# Altium PCB Carrier with Power Supply.PcbDoc (part 3 of 4)
Units mm, origin at the board's own origin, x right, y up, seen from the top; angles counter-clockwise.
Board outline 756.27 x 168 mm, 6 copper layers (Top Layer, Signal Layer 2, Signal Layer 1, VCC, GND, Bottom Layer), stack 1.551 mm thick; 145 components, 326 nets, 1962 pads, 760 vias.
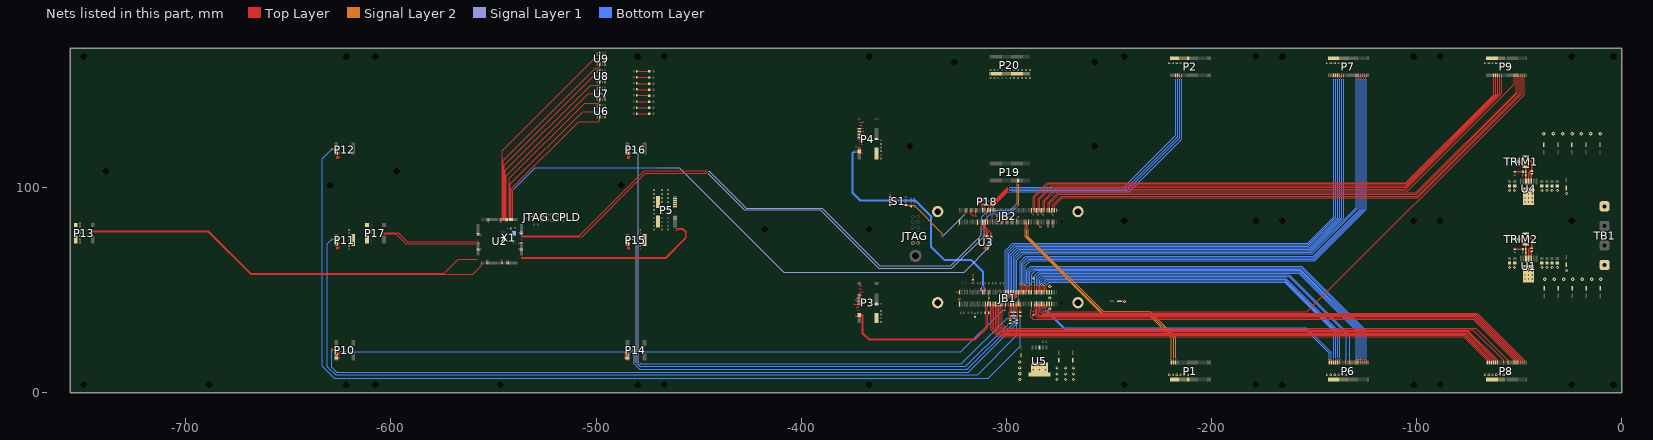
[diagram p7: the nets of this part, all layers, seen from the top]

## Via types
v1: diameter 0.5, hole 0.3, Top Layer to Bottom Layer, 213 vias
v2: diameter 0.9, hole 0.5, Top Layer to Bottom Layer, 182 vias
v3: diameter 0.7, hole 0.3, Top Layer to Bottom Layer, 112 vias
v4: diameter 1.1, hole 0.7, Top Layer to Bottom Layer, 84 vias
v5: diameter 1.5, hole 0.7, Top Layer to Bottom Layer, 59 vias
v6: diameter 1.7, hole 0.7, Top Layer to Bottom Layer, 58 vias
v7: diameter 0.8, hole 0.3, Top Layer to Bottom Layer, 36 vias
v8: diameter 0.9, hole 0.3, Top Layer to Bottom Layer, 6 vias
v9: diameter 1, hole 0.5, Top Layer to Bottom Layer, 4 vias
v10: diameter 1.1, hole 0.5, Top Layer to Bottom Layer, 4 vias
v11: diameter 0.7, hole 0.5, Top Layer to Bottom Layer, 1 vias
v12: diameter 1.3, hole 0.7, Top Layer to Bottom Layer, 1 vias

## Nets (pads, with @x,y where several pads share a name; then routed paths per layer and width w, separated by ;. In a path a pad name is that pad's centre, name@x,y a point inside that pad or via, vN(x,y) a via of type N, cw(c..) or ccw(c..) an arc to the next point about the centre after c; other vN are vias at no path point) (continued)
FO_TX20: JB2.77 P2.23 | length 138.4
  Top Layer w0.3: JB2.77@-306.037,89.056 -306.037,91.371 -299.238,98.171 v1(-298.06,98.171) ; v3(-214.475,153.229) P2.23@-214.476,154.907
  Bottom Layer w0.3: v1(-298.06,98.171) -240.079,98.171 -214.475,123.775 v3(-214.475,153.229)
FO_TX21: JB2.79 P2.19 | length 137.9
  Top Layer w0.3: JB2.79@-306.837,89.056 -306.837,91.278 -299.305,98.811 v1(-298.96,98.811) ; v3@-215.476,153.23 P2.19@-215.476,154.907
  Bottom Layer w0.3: v1(-298.96,98.811) -240.979,98.811 -215.475,124.315 v3(-215.475,153.229)
FO_TX22: JB2.81 P2.15 | length 137.2
  Top Layer w0.3: JB2.81@-307.637,89.056 -307.637,91.185 -299.252,99.571 v1(-298.06,99.571) ; v3@-216.476,153.23 P2.15@-216.476,154.907
  Bottom Layer w0.3: v1(-298.06,99.571) -241.879,99.571 -216.475,124.975 v3(-216.475,153.229)
FO_TX23: JB2.83 P2.11 | length 136.6
  Top Layer w0.3: JB2.83@-308.437,89.056 -308.437,91.093 -299.319,100.211 v1(-298.96,100.211) ; v3(-217.475,153.229) P2.11@-217.476,154.907
  Bottom Layer w0.3: v1(-298.96,100.211) -242.779,100.211 -217.475,125.515 v3(-217.475,153.229)
FO_TX24: JB2.36 P1.12 | length 111.6
  Top Layer w0.3: P1.12@-217.476,14.823 v3@-217.476,16.5
  Top Layer w0.4: v7(-289.237,80.551) JB2.36@-289.237,83.328
  Signal Layer 2 w0.4: v7(-289.237,80.551) -289.237,76.138 -252.84,39.741 -230.1,39.741 -217.476,27.117 v3@-217.476,16.5
  other v3: -217.477,16.501
FO_TX25: JB2.38 P1.8 | length 111.4
  Top Layer w0.3: P1.8@-218.476,14.823 v3@-218.476,16.5
  Top Layer w0.4: v7(-290.037,79.871) JB2.38@-290.037,83.328
  Signal Layer 2 w0.4: v7(-290.037,79.871) -290.037,76.089 -252.642,38.694 -230.1,38.694 -218.476,27.07 v3@-218.476,16.5
  other v3: -218.477,16.501
FO_TX26: JB2.40 P1.4 | length 111.2
  Top Layer w0.3: P1.4@-219.476,14.823 v3@-219.476,16.5
  Top Layer w0.4: v7(-290.837,80.551) JB2.40@-290.837,83.328
  Signal Layer 2 w0.4: v7(-290.837,80.551) -290.837,76.041 -252.444,37.648 -230.1,37.648 -219.477,27.025 v3(-219.477,16.501)
FO_TX27: JB1.13 P6.12 | length 168.6
  Top Layer w0.3: P6.12@-140.476,14.823 v3@-140.476,16.5
  Top Layer w0.4: JB1.13@-280.437,49.391 v7(-280.437,52.168)
  Bottom Layer w0.4: v7(-280.437,52.168) -280.437,52.451 -279.037,53.851 -164.36,53.851 -140.477,29.968 v3(-140.477,16.501)
FO_TX28: JB1.15 P6.16 | length 171.4
  Top Layer w0.3: P6.16@-139.476,14.823 v3@-139.476,16.5
  Top Layer w0.4: JB1.15@-281.237,49.391 v7(-281.237,52.848)
  Bottom Layer w0.4: v7(-281.237,52.848) -281.237,53.131 -279.777,54.591 -164.251,54.591 -139.477,29.817 v3(-139.477,16.501)
FO_TX29: JB1.17 P6.20 | length 174.1
  Top Layer w0.3: P6.20@-138.476,14.823 v3@-138.476,16.5
  Top Layer w0.4: JB1.17@-282.037,49.391 v7(-282.037,52.168)
  Bottom Layer w0.4: v7(-282.037,52.168) -282.037,53.811 -280.517,55.331 -164.143,55.331 -138.477,29.666 v3(-138.477,16.501)
FO_TX30: JB1.19 P6.24 | length 176.8
  Top Layer w0.3: P6.24@-137.476,14.823 v3@-137.476,16.5
  Top Layer w0.4: JB1.19@-282.837,49.391 v7(-282.837,52.848)
  Bottom Layer w0.4: v7(-282.837,52.848) -282.837,54.491 -281.257,56.071 -164.034,56.071 -137.477,29.514 v3(-137.477,16.501)
FO_TX31: JB1.21 P6.36 | length 181.6
  Top Layer w0.3: P6.36@-134.476,14.823 v3@-134.476,16.5
  Top Layer w0.4: JB1.21@-283.637,49.391 v7(-283.637,52.168)
  Bottom Layer w0.4: v7(-283.637,52.168) -283.637,55.171 -281.997,56.811 -162.251,56.811 -134.2,28.76 -134.2,16.778 v3(-134.477,16.501)
FO_TX32: JB1.23 P6.44 | length 184.6
  Top Layer w0.3: P6.44@-132.476,14.823 v3@-132.476,16.5
  Top Layer w0.4: JB1.23@-284.437,49.391 v7(-284.437,52.848)
  Bottom Layer w0.4: v7(-284.437,52.848) -284.437,55.851 -282.737,57.551 -161.944,57.551 -132.477,28.084 v3(-132.477,16.501)
FO_TX33: JB1.25 P6.56 | length 190.7
  Top Layer w0.3: P6.56@-129.476,14.823 v3@-129.476,16.5
  Top Layer w0.4: JB1.25@-285.237,49.391 v7(-285.237,52.168)
  Bottom Layer w0.4: v7(-285.237,52.168) -285.237,56.531 -283.477,58.291 -157.491,58.291 -129.42,30.22 -129.42,16.558 v3(-129.477,16.501)
FO_TX34: JB1.27 P6.60 | length 193.5
  Top Layer w0.3: P6.60@-128.476,14.823 v3@-128.476,16.5
  Top Layer w0.4: JB1.27@-286.037,49.391 v7(-286.037,52.848)
  Bottom Layer w0.4: v7(-286.037,52.848) -286.037,57.211 -284.217,59.031 -157.184,59.031 -128.478,30.324 v3(-128.478,16.501)
FO_TX35: JB1.31 P6.64 | length 197
  Top Layer w0.3: P6.64@-127.476,14.823 v3@-127.476,16.5
  Top Layer w0.4: JB1.31@-287.637,49.391 v7(-287.637,52.168)
  Bottom Layer w0.4: v7(-287.637,52.168) -287.637,57.811 -285.747,59.701 -156.907,59.701 -127.478,30.272 v3(-127.478,16.501)
FO_TX36: JB1.33 P6.68 | length 199.8
  Top Layer w0.3: P6.68@-126.476,14.823 v3@-126.476,16.5
  Top Layer w0.4: JB1.33@-288.437,49.391 v7(-288.437,52.848)
  Bottom Layer w0.4: v7(-288.437,52.848) -288.437,58.491 -286.537,60.391 -156.621,60.391 -126.478,30.247 v3(-126.478,16.501)
FO_TX37: JB1.35 P6.72 | length 202.6
  Top Layer w0.3: P6.72@-125.476,14.823 v3@-125.476,16.5
  Top Layer w0.4: JB1.35@-289.237,49.391 v7(-289.237,52.168)
  Bottom Layer w0.4: v7(-289.237,52.168) -289.237,59.171 -287.277,61.131 -156.315,61.131 -125.478,30.294 v3(-125.478,16.501)
FO_TX38: JB1.37 P6.76 | length 205.4
  Top Layer w0.3: P6.76@-124.476,14.823 v3@-124.476,16.5
  Top Layer w0.4: JB1.37@-290.037,49.391 v7(-290.037,52.848)
  Bottom Layer w0.4: v7(-290.037,52.848) -290.037,59.851 -288.017,61.871 -156.008,61.871 -124.478,30.34 v3(-124.478,16.501)
FO_TX39: JB1.39 P7.75 | length 255.7
  Top Layer w0.3: v3(-124.475,153.229) P7.75@-124.476,154.907
  Top Layer w0.4: JB1.39@-290.837,49.391 v7(-290.837,52.168)
  Bottom Layer w0.4: v7(-290.837,52.168) -290.837,61.951 -288.337,64.451 -149.532,64.451 -124.476,89.507 v3(-124.475,153.229)
FO_TX40: JB1.41 P7.71 | length 255.9
  Top Layer w0.3: v3@-125.476,153.23 P7.71@-125.476,154.907
  Top Layer w0.4: JB1.41@-291.637,49.391 v7(-291.637,52.848)
  Bottom Layer w0.4: v7(-291.637,52.848) -291.637,62.631 -289.077,65.191 -149.838,65.191 -125.476,89.553 v3@-125.476,153.23
  other v3: -125.475,153.229
FO_TX41: JB1.43 P7.67 | length 256.1
  Top Layer w0.3: v3@-126.476,153.23 P7.67@-126.476,154.907
  Top Layer w0.4: JB1.43@-292.437,49.391 v7(-292.437,52.168)
  Bottom Layer w0.4: v7(-292.437,52.168) -292.437,63.311 -289.817,65.931 -150.145,65.931 -126.476,89.6 v3@-126.476,153.23
  other v3: -126.475,153.229
FO_TX42: JB1.45 P7.63 | length 256.2
  Top Layer w0.3: v3(-127.475,153.229) P7.63@-127.476,154.907
  Top Layer w0.4: JB1.45@-293.237,49.391 v7(-293.237,52.848)
  Bottom Layer w0.4: v7(-293.237,52.848) -293.237,63.991 -290.557,66.671 -150.451,66.671 -127.476,89.646 v3(-127.475,153.229)
FO_TX43: JB1.49 P7.59 | length 262.4
  Top Layer w0.3: v3(-128.475,153.229) P7.59@-128.476,154.907
  Top Layer w0.4: v7(-294.837,46.614) JB1.49@-294.837,49.391
  Bottom Layer w0.4: v7(-294.837,46.614) -294.837,64.671 -291.697,67.811 -150.923,67.811 -128.476,90.258 v3(-128.475,153.229)
FO_TX44: JB1.51 P7.55 | length 264
  Top Layer w0.3: v3@-129.476,153.23 P7.55@-129.476,154.907
  Top Layer w0.4: v7(-295.637,45.934) JB1.51@-295.637,49.391
  Bottom Layer w0.4: v7(-295.637,45.934) -295.637,65.351 -292.437,68.551 -151.23,68.551 -129.476,90.305 v3@-129.476,153.23
  other v3: -129.475,153.229
FO_TX45: JB1.53 P7.31 | length 260.7
  Top Layer w0.3: v3@-135.476,153.23 P7.31@-135.476,154.907
  Top Layer w0.4: v7(-296.437,46.614) JB1.53@-296.437,49.391
  Bottom Layer w0.4: v7(-296.437,46.614) -296.437,66.031 -293.177,69.291 -151.536,69.291 -135.475,85.353 -135.475,151.375 v3(-135.475,153.229)
FO_TX46: JB1.55 P7.27 | length 262.2
  Top Layer w0.3: v3@-136.476,153.23 P7.27@-136.476,154.907
  Top Layer w0.4: v7(-297.237,45.934) JB1.55@-297.237,49.391
  Bottom Layer w0.4: v7(-297.237,45.934) -297.237,66.711 -293.917,70.031 -151.843,70.031 -136.475,85.399 v3(-136.475,153.229)
FO_TX47: JB1.57 P7.23 | length 261.1
  Top Layer w0.3: v3(-137.475,153.229) P7.23@-137.476,154.907
  Top Layer w0.4: v7(-298.037,46.614) JB1.57@-298.037,49.391
  Bottom Layer w0.4: v7(-298.037,46.614) -298.037,67.391 -294.657,70.771 -152.149,70.771 -137.475,85.446 v3(-137.475,153.229)
FO_TX48: JB1.59 P7.19 | length 262.6
  Top Layer w0.3: v3(-138.475,153.229) P7.19@-138.476,154.907
  Top Layer w0.4: v7(-298.837,45.934) JB1.59@-298.837,49.391
  Bottom Layer w0.4: v7(-298.837,45.934) -298.837,68.071 -295.397,71.511 -152.456,71.511 -138.475,85.492 v3(-138.475,153.229)
FO_TX49: JB1.61 P7.15 | length 261.4
  Top Layer w0.3: v3@-139.476,153.23 P7.15@-139.476,154.907
  Top Layer w0.4: v7(-299.637,46.614) JB1.61@-299.637,49.391
  Bottom Layer w0.4: v7(-299.637,46.614) -299.637,68.751 -296.137,72.251 -152.762,72.251 -139.475,85.539 v3(-139.475,153.229)
FO_TX50: JB1.63 P7.11 | length 262.9
  Top Layer w0.3: v3(-140.475,153.229) P7.11@-140.476,154.907
  Top Layer w0.4: v7(-300.437,45.934) JB1.63@-300.437,49.391
  Bottom Layer w0.4: v7(-300.437,45.934) -300.437,69.431 -296.877,72.991 -153.069,72.991 -140.475,85.585 v3(-140.475,153.229)
FO_TX51: JB1.14 P6.8 | length 154.9
  Top Layer w0.3: P6.8@-141.476,14.823 v3@-141.476,16.5
  Top Layer w0.4: v1(-280.437,40.681) JB1.14@-280.437,43.168
  Bottom Layer w0.4: v1(-280.437,40.681) -271.647,31.891 -153.83,31.891 -141.477,19.539 v3(-141.477,16.501)
FO_TX52: JB1.16 P6.4 | length 154.7
  Top Layer w0.3: v3(-142.477,16.501) -142.476,16.5 P6.4@-142.476,14.823
  Top Layer w0.4: v1(-281.237,40.681) JB1.16@-281.237,43.168
  Bottom Layer w0.4: v1(-281.237,40.681) -281.237,40.562 -271.767,31.091 -154.161,31.091 -142.477,19.407 v3(-142.477,16.501)
FO_TX53: JB2.3 P9.71 | length 261.4
  Top Layer w0.3: JB2.3@-276.437,89.391 -276.437,91.401 -272.607,95.231 -99.439,95.231 -48.476,146.194 P9.71@-48.476,154.907
FO_TX54: JB2.5 P9.67 | length 261.5
  Top Layer w0.3: JB2.5@-277.237,89.391 -277.237,91.732 -273.173,95.797 -99.673,95.797 -49.476,145.994 P9.67@-49.476,154.907
FO_TX55: JB2.9 P9.63 | length 262.1
  Top Layer w0.3: JB2.9@-278.837,89.391 -278.837,92.395 -274.305,96.928 -100.142,96.928 -50.476,146.594 P9.63@-50.476,154.907
FO_TX56: JB2.11 P9.59 | length 262.2
  Top Layer w0.3: JB2.11@-279.637,89.391 -279.637,92.726 -274.87,97.494 -100.376,97.494 -51.476,146.394 P9.59@-51.476,154.907
FO_TX57: JB2.15 P9.55 | length 260.9
  Top Layer w0.3: JB2.15@-281.237,89.391 -281.237,93.389 -276.002,98.625 -104.235,98.625 -52.476,150.384 P9.55@-52.476,154.907
FO_TX58: JB2.17 P9.31 | length 258.4
  Top Layer w0.3: JB2.17@-282.037,89.391 -282.037,93.721 -276.567,99.191 -105.32,99.191 -58.476,146.035 P9.31@-58.476,154.907
FO_TX59: JB2.21 P9.27 | length 259.4
  Top Layer w0.3: JB2.21@-283.637,89.391 -283.637,94.383 -277.699,100.322 -105.179,100.322 -59.476,146.025 P9.27@-59.476,154.907
FO_TX60: JB2.23 P9.23 | length 259.6
  Top Layer w0.3: JB2.23@-284.437,89.391 -284.437,94.715 -278.264,100.888 -105.32,100.888 -60.476,145.732 P9.23@-60.476,154.907
FO_TX61: JB2.27 P9.19 | length 260.6
  Top Layer w0.3: JB2.27@-286.037,89.391 -286.037,95.377 -279.396,102.019 -105.179,102.019 -61.476,145.722 P9.19@-61.476,154.907
FO_TX62: JB2.29 P9.15 | length 260.8
  Top Layer w0.3: JB2.29@-286.837,89.391 -286.837,95.709 -279.961,102.585 -105.32,102.585 -62.476,145.429 P9.15@-62.476,154.907
FO_TX63: JB1.18 P9.75 | length 291.1
  Top Layer w0.3: JB1.18@-282.037,43.168 -282.037,40.161 -281.417,39.541 -153.417,39.541 -47.476,145.482 P9.75@-47.476,154.907
FO_TX64: JB1.20 P8.76 | length 249.7
  Top Layer w0.3: JB1.20@-282.837,43.168 -282.837,39.781 -281.894,38.838 -70.441,38.838 -47.476,15.873 P8.76@-47.476,14.823
FO_TX65: JB1.22 P8.72 | length 249.7
  Top Layer w0.3: JB1.22@-283.637,43.168 -283.637,39.407 -282.569,38.338 -70.941,38.338 -48.476,15.873 P8.72@-48.476,14.823
FO_TX66: JB1.24 P8.68 | length 250.1
  Top Layer w0.3: JB1.24@-284.437,43.168 -284.437,38.501 -283.774,37.838 -71.441,37.838 -49.476,15.873 P8.68@-49.476,14.823
FO_TX67: JB1.26 P8.64 | length 249.9
  Top Layer w0.3: JB1.26@-285.237,43.168 -285.237,38.411 -284.164,37.338 -71.941,37.338 -50.476,15.873 P8.64@-50.476,14.823
FO_TX68: JB1.28 P8.60 | length 250
  Top Layer w0.3: JB1.28@-286.037,43.168 -286.037,41.018 -285.737,40.718 -285.737,37.601 -284.747,36.611 -72.214,36.611 -51.476,15.873 P8.60@-51.476,14.823
FO_TX69: JB1.32 P8.56 | length 251.9
  Top Layer w0.3: JB1.32@-287.637,43.168 -287.637,40.551 -288.117,40.071 -288.117,36.911 -287.067,35.861 -72.464,35.861 -52.476,15.873 P8.56@-52.476,14.823
FO_TX70: JB1.68 P8.44 | length 264.6
  Top Layer w0.3: JB1.68@-302.037,43.168 -302.037,33.438 -300.067,31.468 -71.071,31.468 -55.476,15.873 P8.44@-55.476,14.823
FO_TX71: JB1.70 P8.36 | length 263.6
  Top Layer w0.3: JB1.70@-302.837,43.168 -302.837,33.107 -300.633,30.902 -72.505,30.902 -57.476,15.873 P8.36@-57.476,14.823
FO_TX72: JB1.72 P8.24 | length 261.6
  Top Layer w0.3: JB1.72@-303.637,43.168 -303.637,32.775 -301.199,30.336 -74.939,30.336 -60.476,15.873 P8.24@-60.476,14.823
FO_TX73: JB1.74 P8.20 | length 261.6
  Top Layer w0.3: JB1.74@-304.437,43.168 -304.437,32.444 -301.764,29.771 -75.374,29.771 -61.476,15.873 P8.20@-61.476,14.823
FO_TX74: JB1.76 P8.16 | length 261.6
  Top Layer w0.3: JB1.76@-305.237,43.168 -305.237,32.113 -302.33,29.205 -75.808,29.205 -62.476,15.873 P8.16@-62.476,14.823
FO_TX75: JB1.78 P8.12 | length 261.6
  Top Layer w0.3: JB1.78@-306.037,43.168 -306.037,31.781 -302.896,28.639 -76.242,28.639 -63.476,15.873 P8.12@-63.476,14.823
FO_TX76: JB1.80 P8.8 | length 261.6
  Top Layer w0.3: JB1.80@-306.837,43.168 -306.837,31.45 -303.461,28.074 -76.677,28.074 -64.476,15.873 P8.8@-64.476,14.823
FO_TX77: JB1.82 P8.4 | length 261.6
  Top Layer w0.3: JB1.82@-307.637,43.168 -307.637,31.118 -304.027,27.508 -77.111,27.508 -65.476,15.873 P8.4@-65.476,14.823
GND: "JTAG CPLD.2" "JTAG CPLD.10" C1.2 C2.2 C3.2 C4.2 C5.2 C6.2 C7.2 C8.2 C9.2 C10.2 C11.2 C12.2 C13.2 C14.2 C15.2 C16.2 C17.2 C18.1 C19.1 C20.2 C21.2 C22.2 C23.1 C24.2 C25.2 C27.2 C28.2 C29.2 C30.2 C31.1 C32.2 C33.2 C34.2 C35.2 C36.2 C37.2 C38.2 C39.2 C40.2 C41.2 C43.2 C44.2 C45.2 C46.2 C47.2 C48.2 C49.2 C50.2 C51.2 C52.2 C53.2 C54.2 JB1.7 JB1.8 JB1.9 JB1.10 JB1.11 JB1.12 JB1.47 JB1.48 JB1.83 JB1.84 JB1.119 JB1.120 JB2.1 JB2.6 JB2.7 JB2.12 JB2.19 JB2.24 JB2.25 JB2.31 JB2.50 JB2.56 JB2.62 JB2.68 JB2.74 JB2.80 JB2.85 JB2.86 JB2.98 JB2.99 JB2.105 JB2.120 JTAG.1 JTAG.2 P1.1 P1.3 P1.5 P1.7 P1.9 P1.11 P1.13 P1.15 P1.17 P1.19 P1.21 P1.23 P1.25 P1.27 P1.29 P1.31 P1.33 P1.35 P1.37 P2.2 P2.4 P2.6 P2.8 P2.10 P2.12 P2.14 P2.16 P2.18 P2.20 P2.22 P2.24 P2.26 P2.28 P2.30 P2.32 P2.34 P2.36 P2.38 P3.7 P3.13 P3.19 P3.25 P3.31 P3.37 P3.42 P3.43 P3.44 P3.46 P3.48 P3.49 P3.50 P3.52 P3.54 P3.55 P3.56 P3.58 P3.60 P3.61 P3.62 P3.64 P3.66 P3.67 P3.68 P3.70 P3.72 P3.74 P3.76 P3.78 P3.80 P4.7 P4.13 P4.19 P4.25 P4.31 P4.37 P4.40 P4.42 P4.43 P4.44 P4.46 P4.48 P4.49 P4.50 P4.52 P4.54 P4.55 P4.56 P4.58 P4.60 P4.61 P4.62 P4.64 P4.66 P4.67 P4.68 P4.70 P4.72 P4.74 P4.76 P4.78 P4.80 P5.1 P5.3 P5.5 P5.7 P5.9 P5.11 P5.13 P5.15 P5.17 P5.18 P5.19 P5.21 P5.22 P5.23 P5.25 P5.26 P5.27 P5.29 P5.30 P5.31 P5.33 P5.34 P5.35 P5.37 P5.38 P5.39 P5.41 P5.42 P5.43 P5.45 P5.46 P5.47 P5.49 P5.50 P5.51 P5.53 P5.54 P5.55 P5.57 P5.58 P5.59 P5.61 P5.63 P5.65 P5.67 P5.69 P5.71 P5.73 P5.75 P5.77 P5.79 P6.1 P6.3 P6.5 P6.7 P6.9 P6.11 P6.13 P6.15 P6.17 P6.19 P6.21 P6.23 P6.25 P6.27 P6.29 P6.31 P6.33 P6.35 P6.37 P7.2 P7.4 P7.6 P7.8 P7.10 P7.12 P7.14 P7.16 P7.18 P7.20 P7.22 P7.24 P7.26 P7.28 P7.30 P7.32 P7.34 P7.36 P7.38 P8.1 P8.3 P8.5 P8.7 P8.9 P8.11 P8.13 P8.15 P8.17 P8.19 P8.21 P8.23 P8.25 P8.27 P8.29 P8.31 P8.33 P8.35 P8.37 P9.2 P9.4 P9.6 P9.8 P9.10 P9.12 P9.14 P9.16 P9.18 P9.20 P9.22 P9.24 P9.26 P9.28 P9.30 P9.32 P9.34 P9.36 P9.38 P10.25 P10.27 P10.29 P10.33 P10.35 P10.37 P11.2 P11.4 P11.6 P11.8 P11.10 P11.12 P11.14 P11.16 P11.18 P11.20 P11.22 P11.24 P11.25 P11.26 P11.27 P11.28 P11.29 P11.30 P11.32 P11.33 P11.34 P11.35 P11.36 P11.37 P11.38 P11.40 P12.25 P12.27 P12.29 P12.33 P12.35 P12.37 P13.1 P13.3 P13.5 P13.7 P13.9 P13.11 P13.13 P13.15 P13.17 P13.19 P13.21 P13.23 P13.25 P13.27 P13.29 P13.31 P13.33 P13.35 P13.37 P13.39 P14.25 P14.27 P14.29 P14.33 P14.35 P14.37 P15.2 P15.4 P15.6 P15.8 P15.10 P15.12 P15.14 P15.16 P15.18 P15.20 P15.22 P15.24 P15.25 P15.26 P15.27 P15.28 P15.29 P15.30 P15.32 P15.33 P15.34 P15.35 P15.36 P15.37 P15.38 P15.40 P16.25 P16.27 P16.29 P16.33 P16.35 P16.37 P17.1 P17.3 P17.5 P17.7 P17.9 P17.11 P17.13 P17.15 P17.17 P17.19 P17.21 P17.23 P17.25 P17.27 P17.29 P17.31 P17.33 P17.35 P17.37 P17.39 P20.2 P20.4 P20.6 P20.8 P20.10 P20.12 P20.14 P20.16 P20.18 P20.20 P20.22 P20.24 P20.26 P20.28 P20.30 P20.32 P20.34 P20.36 P20.38 P20.40 P20.42 P20.44 P20.46 P20.48 P20.50 P20.52 P20.54 P20.56 P20.58 P20.60 P20.62 P20.64 P20.66 P20.68 P20.70 P20.72 P20.74 P20.76 P20.78 P20.80 pad.@-265.037,43.992 pad.@-265.037,88.392 pad.@-333.437,43.992 pad.@-333.437,88.392 R19.1 S1.5 S1.6 S1.7 S1.8 TB1.1 TB1.4 TRIM1.c TRIM2.c U1.4 U1.8 U2.10 U2.17 U2.26 U2.47 U2.54 U2.65 U2.83 U2.92 U2.99 U2.115 U2.128 U2.135 U3.2 U3.4 U3.7 U4.4 U4.8 U5.3 U5.6 U6.4 U7.4 U8.4 U9.4 X1.2 | length 271.8
  Top Layer w0.3: P10.37@-626.69,16.554 -625.752,16.554 v1(-625.252,17.054) ; P10.35@-626.69,17.054 v1(-625.252,17.054) ; P10.33@-626.69,17.554 -625.752,17.554 v1(-625.252,17.054) ; P10.29@-626.69,18.554 -625.752,18.554 v1(-625.252,19.054) ; P10.27@-626.69,19.054 v1(-625.252,19.054) ; P10.25@-626.69,19.554 -625.752,19.554 v1(-625.252,19.054) ; P11.37@-626.69,70.304 -625.752,70.304 v1(-625.252,70.804) ; P11.35@-626.69,70.804 v1(-625.252,70.804) ; P11.33@-626.69,71.304 -625.752,71.304 v1(-625.252,70.804) ; P11.29@-626.69,72.304 -625.752,72.304 v1(-625.252,72.804) ; P11.27@-626.69,72.804 v1(-625.252,72.804) ; P11.25@-626.69,73.304 -625.752,73.304 v1(-625.252,72.804) ; P12.37@-626.69,114.408 -625.752,114.408 v1(-625.252,114.908) ; P12.35@-626.69,114.908 v1(-625.252,114.908) ; P12.33@-626.69,115.408 -625.752,115.408 v1(-625.252,114.908) ; P12.29@-626.69,116.408 -625.752,116.408 v1(-625.252,116.908) ; P12.27@-626.69,116.908 v1(-625.252,116.908) ; P12.25@-626.69,117.408 -625.752,117.408 v1(-625.252,116.908) ; U2.99@-557.564,69.678 -556.64,69.678 v1(-556.197,70.12) ; U2.92@-557.564,73.178 -556.515,73.178 v1(-556.197,72.86) ; U2.83@-557.564,77.678 -557.554,77.668 -556.683,77.668 -556.197,77.182 v1(-556.197,77.04) ; v1(-553.232,64.685) -553.007,64.685 -552.697,64.375 U2.115@-552.697,63.311 ; v1(-552.762,83.205) -552.547,83.205 -552.197,83.555 U2.65@-552.197,84.545 ; U2.54@-546.697,84.545 -546.697,83.55 v1(-546.352,83.205) ; U2.128@-546.197,63.311 -546.197,64.39 v1(-545.902,64.685) ; v1(-543.677,83.125) -543.197,83.605 U2.47@-543.197,84.545 ; v1(-543.232,64.685) -542.957,64.685 -542.697,64.425 U2.135@-542.697,63.311 ; v1(-537.867,77.825) -537.72,77.678 U2.26@-536.33,77.678 ; v1(-537.767,70.21) -537.234,69.678 U2.10@-536.33,69.678 ; v1(-537.747,72.635) -537.204,73.178 U2.17@-536.33,73.178 ; v3(-496.35,136.778) -495.605,136.033 U6.4@-495.605,134.908 ; v3(-496.35,145.295) -495.605,144.55 U7.4@-495.605,143.425 ; v3(-496.35,153.811) -495.605,153.066 U8.4@-495.605,151.941 ; v3(-496.35,162.328) -495.605,161.583 U9.4@-495.605,160.458 ; P14.37@-484.69,16.554 -485.628,16.554 v1(-486.128,17.054) ; P14.35@-484.69,17.054 v1(-486.128,17.054) ; P14.33@-484.69,17.554 -485.628,17.554 v1(-486.128,17.054) ; P14.29@-484.69,18.554 -485.628,18.554 v1(-486.128,19.054) ; P14.27@-484.69,19.054 v1(-486.128,19.054) ; P14.25@-484.69,19.554 -485.628,19.554 v1(-486.128,19.054) ; P15.37@-484.69,70.304 -483.752,70.304 v1(-483.252,70.804) ; P15.35@-484.69,70.804 v1(-483.252,70.804) ; P15.33@-484.69,71.304 -483.752,71.304 v1(-483.252,70.804) ; P15.29@-484.69,72.304 -483.752,72.304 v1(-483.252,72.804) ; P15.27@-484.69,72.804 v1(-483.252,72.804) ; P15.25@-484.69,73.304 -483.752,73.304 v1(-483.252,72.804) ; P16.37@-484.69,114.408 -483.752,114.408 v1(-483.252,114.908) ; P16.35@-484.69,114.908 v1(-483.252,114.908) ; P16.33@-484.69,115.408 -483.752,115.408 v1(-483.252,114.908) ; P16.29@-484.69,116.408 -483.752,116.408 v1(-483.252,116.908) ; P16.27@-484.69,116.908 v1(-483.252,116.908) ; P16.25@-484.69,117.408 -483.752,117.408 v1(-483.252,116.908) ; v1(-374.468,43.298) P3.43@-371.61,43.298 ; v1(-373.6,37.43) -373.468,37.298 P3.67@-371.61,37.298 ; v1(-373.432,119.978) P4.55@-371.61,119.978 ; v1(-373.052,38.798) P3.61@-371.61,38.798 ; v1(-373.052,40.298) P3.55@-371.61,40.298 ; v1(-373.052,41.798) P3.49@-371.61,41.798 ; P3.37@-371.61,44.798 -372.938,44.798 v1(-373.42,45.28) -373.42,45.62 -372.942,46.098 -372.741,46.298 P3.31@-371.61,46.298 ; P3.25@-371.61,47.798 -370.292,47.798 v1(-370.06,48.03) ; P3.19@-371.61,49.298 v1(-370.168,49.298) ; P3.13@-371.61,50.798 v1(-370.168,50.798) ; P3.7@-371.61,52.298 v1(-370.168,52.298) ; P4.67@-371.61,116.978 v1(-370.172,116.978) ; P4.61@-371.61,118.478 -370.408,118.478 v1(-370.06,118.13) ; P4.49@-371.61,121.478 -369.752,121.478 v1(-369.62,121.61) ; P4.43@-371.61,122.978 v1(-369.788,122.978) ; P4.37@-371.61,124.478 -369.752,124.478 v1(-369.62,124.346) ; P4.31@-371.61,125.978 -369.752,125.978 v1(-369.62,126.11) ; P4.25@-371.61,127.478 -369.752,127.478 v1(-369.62,127.61) ; P4.19@-371.61,128.978 v1(-369.788,128.978) ; P4.13@-371.61,130.478 -369.752,130.478 v1(-369.62,130.346) ; P4.7@-371.61,131.978 -369.752,131.978 v1(-369.62,132.11) ; P3.44@-363.31,43.298 P3.42@-363.31,43.798 ; P4.42@-363.31,123.478 P4.40@-363.31,123.978 ; v3(-314.037,81.643) JB2.98@-314.037,83.328 JB2.98@-314.03,83.321 ; U3.7@-310.245,76.33 v1(-310.245,77.396) ; JB2.86@-309.237,83.328 JB2.85@-309.237,89.056
  Top Layer w0.4: R19.1@-530.73,85.85 v2(-530.73,87.22) ; v2(-356.55,97.22) S1.5@-356.55,95.43 -356.52,95.4 S1.8@-356.52,91.62 ; v2(-324.344,49.056) JB1.119@-322.837,49.056 ; JB1.120@-322.837,43.328 v2@-322.837,45.783 ; v3(-322.837,81.253) JB2.120@-322.837,83.328 ; JB2.105@-317.237,89.056 -317.237,87.277 -316.41,86.45 v1(-314.16,86.45) -314.37,86.45 -314.837,86.917 JB2.99@-314.837,89.056 ; v3(-315.417,36.148) -315.417,37.113 C16.2@-315.357,37.173 ; U3.2@-310.245,70.53 -310.245,72.005 -310.01,72.24 -309.28,72.24 -308.945,71.905 U3.4@-308.945,70.53 ; JB1.84@-308.437,43.328 JB1.83@-308.437,49.056 ; v2(-306.84,86.21) -306.84,83.331 JB2.80@-306.837,83.328 ; JB2.74@-304.44,83.331 v2(-304.44,86.21) ; JB2.68@-302.037,83.328 v2(-302.037,86.207) ; JB2.62@-299.637,83.328 -299.637,84.883 -298.83,85.69 v2(-298.45,85.69) -297.98,85.69 -297.237,84.947 JB2.56@-297.237,83.328 ; JB2.50@-294.837,83.328 -294.837,85.083 v2(-294.2,85.72) ; JB1.48@-294.037,43.328 JB1.47@-294.037,49.056 ; JB2.31@-287.637,89.056 -287.637,87.647 v2(-286.87,86.88) ; v3(-286.857,56.911) -286.857,55.736 C15.2@-286.837,55.716 ; v3(-286.837,36.911) C13.2@-286.837,38.086 ; JB2.25@-285.237,89.056 -285.237,87.647 v2(-284.47,86.88) ; JB2.24@-284.437,83.328 -284.437,82.067 v2(-283.3,80.93) ; JB2.19@-282.837,89.056 -282.837,87.647 v2(-282.02,86.83) ; v2(-279.637,81.123) JB2.12@-279.637,83.328 ; JB2.7@-278.037,89.056 -278.037,87.647 v2(-277.27,86.88) ; v2(-277.237,81.123) JB2.6@-277.237,83.328 ; JB2.1@-275.637,89.056 v2(-274.494,89.056)
  Top Layer w0.5: C14.2@-316.187,55.176 -316.167,55.196 v3(-316.167,57.731)
  Top Layer w0.65: C29.2@-244.947,44.628 v5(-242.427,44.628)
  Top Layer w0.7: TRIM1.c@-46.797,115.268 -43.917,112.388 C27.2@-43.917,108.178 -44.677,108.178 -45.417,107.438 -45.417,103.148 U4.4@-45.387,103.118 ; TRIM2.c@-46.767,77.589 -43.887,74.709 -43.887,70.499 -44.647,70.499 -45.387,69.759 U1.4@-45.387,65.469 U1.4@-45.357,65.439
  Bottom Layer w0.3: v1@-546.352,83.166 v1(-546.352,83.205) ; C37.2@-497.839,137.218 -496.943,137.218 v3@-496.35,136.625 ; C38.2@-497.839,145.888 -496.943,145.888 v3(-496.35,145.295) ; C39.2@-497.839,154.308 -496.943,154.308 v3@-496.35,153.715 ; C40.2@-497.839,162.898 -496.943,162.898 v3@-496.35,162.305
  Bottom Layer w0.5: C9.2@-557.627,70.12 v1(-556.197,70.12) ; C8.2@-557.627,72.86 v1(-556.197,72.86) ; C6.2@-557.627,77.04 v1(-556.197,77.04) ; C10.2@-553.232,63.255 v1(-553.232,64.685) ; v1(-552.762,83.205) C5.2@-552.762,84.635 ; v1(-546.352,83.205) C4.2@-546.352,84.635 ; C11.2@-545.902,63.255 v1(-545.902,64.685) ; C3.2@-543.772,84.635 -543.772,83.22 v1(-543.677,83.125) ; C12.2@-543.232,63.255 v1(-543.232,64.685) ; v1(-537.867,77.825) -537.239,78.453 C2.2@-536.33,78.453 ; v1(-537.767,70.21) C17.2@-536.337,70.21 ; v1@-537.757,72.625 v1(-537.747,72.635) -537.242,73.14 C1.2@-536.337,73.14 ; v3@-309.7,72.26 -308.817,73.143 C28.2@-308.437,73.143
  other v2: -361.07,34.65 -361.07,36.418 -361.07,38.186 -361.07,39.954 -361.07,43.49 -294.03,45.37 -322.837,45.73 -308.41,46.22 -47.187,55.519 -45.392,55.519 -43.597,55.519 -45.392,57.472 -43.597,57.472 -47.187,57.579 -45.392,59.426 -43.597,59.426 -47.187,59.629 -47.187,61.379 -45.392,61.379 -43.597,61.379 -620.47,70.06 -478.47,70.06 -620.47,71.612 -478.47,71.612 -620.47,73.163 -478.47,73.163 -751.584,73.325 -609.584,73.325 -620.47,74.715 -478.47,74.715 -751.584,74.877 -609.584,74.877 -620.47,76.267 -478.47,76.267 -751.584,76.428 -609.584,76.428 -620.47,77.818 -478.47,77.818 -751.584,77.98 -609.584,77.98 -620.47,79.37 -478.47,79.37 -751.584,79.532 -609.584,79.532 -471.718,79.605 -467.818,79.605 -464.92,79.608 -539.42,80.5 -751.584,81.083 -609.584,81.083 -471.718,81.534 -467.818,81.534 -464.92,81.537 -751.584,82.635 -609.584,82.635 -471.718,83.463 -467.818,83.463 -464.92,83.466 -471.718,85.392 -467.818,85.392 -464.92,85.395 -309.24,87.13 -471.718,87.321 -467.818,87.321 -464.92,87.324 -471.718,89.25 -467.818,89.25 -464.92,89.253 -471.718,91.179 -467.818,91.179 -464.92,91.182 -47.187,93.048 -45.392,93.048 -43.597,93.048 -471.718,93.108 -467.818,93.108 -464.92,93.111 -45.392,95.001 -43.597,95.001 -471.718,95.037 -467.818,95.037 -464.92,95.04 -47.187,95.108 -471.718,96.966 -467.818,96.966 -464.92,96.969 -45.392,96.955 -43.597,96.955 -47.187,97.158 -471.718,98.895 -467.818,98.895 -464.92,98.898 -47.187,98.908 -45.392,98.908 -43.597,98.908 -361.07,114.33 -361.07,116.098 -361.07,117.866 -361.07,119.634 -361.07,121.402 -361.07,123.17 -307.74,153.58 -305.811,153.58 -303.882,153.58 -301.953,153.58 -300.024,153.58 -298.095,153.58 -296.166,153.58 -294.237,153.58 -292.308,153.58 -290.379,153.58 -288.45,153.58 -307.74,157.48 -305.811,157.48 -303.882,157.48 -301.953,157.48 -300.024,157.48 -298.095,157.48 -296.166,157.48 -294.237,157.48 -292.308,157.48 -290.379,157.48 -288.45,157.48
  other v3: -309.66,72.23
  other v4: -220.602,8.87 -218.768,8.87 -216.934,8.87 -215.1,8.87 -213.266,8.87 -211.432,8.87 -143.602,8.87 -141.768,8.87 -139.934,8.87 -138.1,8.87 -136.266,8.87 -134.432,8.87 -66.602,8.87 -64.768,8.87 -62.934,8.87 -61.1,8.87 -59.266,8.87 -57.432,8.87 -220.602,160.86 -218.768,160.86 -216.934,160.86 -215.1,160.86 -213.266,160.86 -211.432,160.86 -143.602,160.86 -141.768,160.86 -139.934,160.86 -138.1,160.86 -136.266,160.86 -134.432,160.86 -66.602,160.86 -64.768,160.86 -62.934,160.86 -61.1,160.86 -59.266,160.86 -57.432,160.86
  other v5: -293.45,6.48 -275.25,6.48 -271.195,6.48 -267.21,6.48 -293.45,9.347 -275.25,9.33 -271.195,9.33 -267.21,9.33 -286.77,11.37 -283.93,11.37 -281.09,11.37 -275.25,12.18 -271.195,12.18 -267.21,12.18 -293.45,12.213 -286.77,13.42 -283.93,13.42 -281.09,13.42 -293.45,15.08 -278.807,40.878 -278.807,46.238 -278.807,51.828 -26.937,59.709 -54.727,61.099 -52.177,61.099 -38.917,61.099 -36.394,61.099 -33.871,61.099 -31.347,61.099 -26.937,97.238 -54.727,98.628 -52.177,98.628 -38.917,98.628 -36.394,98.628 -33.871,98.628 -31.347,98.628
  other v6: -37.467,55.38 -32.907,55.38 -28.347,55.38 -23.787,55.38 -19.227,55.38 -14.667,55.38 -10.107,55.38 -37.897,126.34 -33.337,126.34 -28.777,126.34 -24.217,126.34 -19.657,126.34 -15.097,126.34 -10.537,126.34
I2C_A_SCL: JB2.92 P19.26 U2.24 U3.6 | length 310.9
  Top Layer w0.3: U2.24@-536.33,76.678 -508.103,76.678 -476.423,108.358 v3(-445.15,108.358) ; JB2.92@-311.637,83.328 -311.637,81.878 v3(-311.837,81.678) -311.837,80.268 -309.595,78.026 U3.6@-309.595,76.33 ; v1(-294.72,102.068) -294.52,102.268 P19.26@-294.52,103.523
  Signal Layer 2 w0.25: v1(-295.69,91.533) -294.72,92.503 v1(-294.72,102.068)
  Signal Layer 1 w0.3: v3(-445.15,108.358) -445.01,108.358 -426.74,90.088 -389.67,90.088 -361.56,61.978 -327.06,61.978 -312.137,76.901 -312.137,81.181 v3@-311.64,81.678
  Bottom Layer w0.3: v3(-311.837,81.678) -311.837,85.898 -308.617,89.118 -298.105,89.118 v1(-295.69,91.533)
I2C_A_SDA: JB2.90 P19.24 U2.23 U3.5 | length 311.2
  Top Layer w0.3: U2.23@-536.33,76.178 -506.75,76.178 -475.88,107.048 v3(-445.61,107.048) ; JB2.90@-310.837,83.328 -310.837,80.195 -308.945,78.303 U3.5@-308.945,76.33 ; v1@-294.02,102.068 P19.24@-294.02,103.523
  Signal Layer 2 w0.25: v1(-294.976,90.813) -294.01,91.779 v1(-294.01,102.068)
  Signal Layer 1 w0.3: v3(-445.61,107.048) -445.49,107.048 -427.635,89.193 -390.565,89.193 -362.084,60.712 -326.536,60.712 -310.85,76.398 v3(-310.85,81.678)
  Bottom Layer w0.3: v3(-310.85,81.678) -310.85,84.053 -307.67,87.233 -298.556,87.233 v1(-294.976,90.813)
I2C_B1_SCL: P13.16 U2.108 | length 199.3
  Top Layer w0.25: P13.16@-745.364,79.069 -688.965,79.069 -668.187,58.291 -573.958,58.291 -567.071,65.178 U2.108@-557.564,65.178
I2C_B1_SDA: P13.18 U2.109 | length 201.1
  Top Layer w0.25: P13.18@-745.364,78.569 -689.155,78.569 -668.427,57.841 -560.117,57.841 -555.697,62.261 U2.109@-555.697,63.311
I2C_B2_SCL: P17.22 U2.93 | length 47.8
  Top Layer w0.25: P17.22@-603.364,77.569 -597.675,77.569 -592.784,72.678 U2.93@-557.564,72.678
I2C_B2_SDA: P17.20 U2.91 | length 47.6
  Top Layer w0.25: P17.20@-603.364,78.069 -596.415,78.069 -592.024,73.678 U2.91@-557.564,73.678
I2C_B3_SCL: P5.76 U2.2 | length 93.7
  Top Layer w0.25: U2.2@-536.33,65.678 -466.01,65.678 -465.96,65.728 -465.774,65.728 -455.91,75.592 -455.91,78.501 -457.734,80.325 P5.76@-461.466,80.325
I2C_B3_SDA: P5.80 U2.3 | length 92.5
  Top Layer w0.25: U2.3@-536.33,66.178 -465.96,66.178 -456.36,75.778 -456.36,78.315 -457.92,79.875 -459.891,79.875 -460.441,79.325 P5.80@-461.466,79.325
JTAGSEL: JB2.111 R17.1 S1.1 | length 48.7
  Top Layer w0.4: v1(-350.51,91.45) -350.34,91.62 S1.1@-348.93,91.62 -347.52,91.62 -346.98,91.08 R17.1@-346.43,91.08 ; v1(-320.525,86.785) -319.637,87.673 JB2.111@-319.637,89.056
  Signal Layer 2 w0.3: v1@-350.5,91.45 -344.97,91.45 -331.19,77.67 v1(-331.19,76.12)
  Signal Layer 1 w0.4: v1(-331.19,76.12) v1(-320.525,86.785)
LCLK_N1: JB1.88 P3.63 R22.2 | length 85.8
  Top Layer w0.3: P3.63@-371.61,38.298 -370.353,38.298 -369.627,37.572 -369.627,29.071 -366.877,26.321 -315.245,26.321 -309.647,31.918 -309.647,37.745 -310.22,38.318 R22.2@-310.22,39.068 -310.037,39.251 JB1.88@-310.037,43.168
LCLK_N2: JB1.91 P4.63 R10.1 | length 123.3
  Top Layer w0.3: v1@-373.16,117.978 P4.63@-371.61,117.978 ; JB1.91@-311.637,49.391 -311.637,51.541 v1(-311.637,51.938)
  Bottom Layer w0.3: v1(-373.19,118.078) -374.13,118.078 -375.127,117.081 -375.127,97.401 -371.419,93.692 -344.629,93.692 -336.793,85.857 -336.793,71.014 -336.5,70.721 -330.357,64.578 -317.204,64.578 -311.477,58.851 -311.477,52.098 v1(-311.637,51.938) -311.637,51.481 -312.1,51.018 R10.1@-312.1,50.268
LCLK_P1: JB1.86 P3.65 R22.1 | length 86.8
  Top Layer w0.3: P3.65@-371.61,37.798 -370.56,37.798 -370.127,37.365 -370.127,28.864 -367.085,25.821 -315.037,25.821 -309.147,31.711 -309.147,37.791 -308.62,38.318 R22.1@-308.62,39.068 -309.237,39.685 JB1.86@-309.237,43.168
LCLK_P2: JB1.89 P4.65 R10.2 | length 122.3
  Top Layer w0.3: v1@-373.16,117.478 P4.65@-371.61,117.478 ; JB1.89@-310.837,49.391 v1(-310.837,51.938)
  Bottom Layer w0.3: v1(-373.19,117.378) -374.123,117.378 -374.627,116.874 -374.627,97.608 -371.212,94.192 -344.422,94.192 -336.293,86.064 -336.293,71.221 -330.15,65.078 -316.997,65.078 -310.977,59.058 -310.977,52.078 v1(-310.837,51.938) -310.837,51.355 -310.5,51.018 R10.2@-310.5,50.268
LED1: U2.43 U6.2 | length 73.9
  Top Layer w0.3: U2.43@-541.197,84.545 -541.197,99.64 -508.519,132.318 -498.76,132.318 -498.145,132.933 U6.2@-498.145,134.908
LED2: U2.44 U6.7 | length 77.5
  Top Layer w0.3: U2.44@-541.697,84.545 -541.697,102.029 -506.579,137.147 -499.241,137.147 -498.145,138.243 U6.7@-498.145,139.708
LED3: U2.45 U7.2 | length 81
  Top Layer w0.25: -505.478,141.276 -498.812,141.276 -498.145,141.943 U7.2@-498.145,143.425
  Top Layer w0.3: U2.45@-542.197,84.545 -542.197,104.556 -505.478,141.276
LED4: U2.48 U7.7 | length 85.5
  Top Layer w0.25: U2.48@-543.697,84.545 -543.697,105.969 -503.76,145.906 -498.652,145.906 -498.145,146.413 U7.7@-498.145,148.225
LED5: U2.49 U8.2 | length 88.8
  Top Layer w0.25: U2.49@-544.197,84.545 -544.197,108.473 -502.612,150.058 -498.64,150.058 -498.145,150.553 U8.2@-498.145,151.941
LED6: U2.50 U8.7 | length 92.8
  Top Layer w0.25: U2.50@-544.697,84.545 -544.697,110.909 -501.018,154.588 -498.71,154.588 -498.145,155.153 U8.7@-498.145,156.741
LED7: U2.51 U9.2 | length 96.2
  Top Layer w0.25: U2.51@-545.197,84.545 -545.197,113.39 -500.069,158.518 -498.7,158.518 -498.145,159.073 U9.2@-498.145,160.458
LED8: U2.52 U9.7 | length 101.6
  Top Layer w0.25: U2.52@-545.697,84.545 -545.697,118.011 -500.54,163.168 -498.56,163.168 -498.145,163.583 U9.7@-498.145,165.258
MIO9: JB2.88 R36.2 U2.42 | length 292.2
  Top Layer w0.25: U2.42@-540.697,84.545 -540.697,98.821 v3(-540.11,99.408)
  Top Layer w0.4: JB2.88@-310.037,83.328 -310.037,80.568 -307.25,77.781 R36.2@-307.25,76.038
  Signal Layer 1 w0.4: v3(-469.72,109.888) -459.51,109.888 -408.51,58.888 -320.54,58.888 -307.28,72.148 v3(-307.28,76.978)
  Bottom Layer w0.4: v3(-540.11,99.408) -529.63,109.888 v3(-469.72,109.888)
MISO_S_ADC1: P10.19 R32.1 | length 359.1
  Top Layer w0.3: v9@-628.734,21.054 P10.19@-626.69,21.054
  Top Layer w0.4: R32.1@-295.637,37.708 -295.137,37.208 v3(-295.137,36.508)
  Bottom Layer w0.4: v9@-628.732,21.054 -628.732,12.626 -626.307,10.201 -318.499,10.201 -295.137,33.563 v3(-295.137,36.508)
  other v9: -628.737,21.054
MISO_S_ADC2: P11.19 R31.1 | length 416.4
  Top Layer w0.3: v9(-628.737,74.804) P11.19@-626.69,74.804
  Top Layer w0.4: v3(-294.837,32.688) R31.1@-294.837,33.878
  Bottom Layer w0.4: v9(-628.737,74.804) -630.906,72.635 -630.906,12.862 -626.875,8.831 -314.009,8.831 -294.837,28.003 v3(-294.837,32.688)
MISO_S_ADC3: P12.19 R30.1 | length 474
  Top Layer w0.3: v9(-628.737,118.908) P12.19@-626.69,118.908
  Top Layer w0.4: v3(-293.247,36.348) -293.237,36.358 R30.1@-293.237,37.708
  Bottom Layer w0.4: v9(-628.737,118.908) -633.437,114.208 -633.437,12.989 -627.579,7.131 -308.839,7.131 -293.247,22.723 v3(-293.247,36.348)
MISO_S_ADC4: P14.19 R33.1 | length 205.8
  Top Layer w0.3: P14.19@-484.69,21.054 v3(-483.037,21.054)
  Signal Layer 1 w0.4: v3(-483.037,21.054) -482.067,21.054 -481.367,20.354 v3(-481.367,14.231)
  Bottom Layer w0.4: v3(-481.367,14.231) -478.677,11.541 -318.959,11.541 -296.437,34.063 R33.1@-296.437,34.778
MISO_S_ADC5: P15.19 R35.1 | length 255.2
  Top Layer w0.3: P15.19@-484.69,74.804 v3(-483.057,74.804)
  Top Layer w0.4: v3(-299.83,32.82) -298.772,33.878 R35.1@-298.037,33.878
  Signal Layer 1 w0.4: v3(-483.057,74.804) -482.08,74.804 ; -482.07,74.814 -480.487,73.231 -480.487,14.781 v3(-479.937,14.231)
  Bottom Layer w0.4: v3(-479.937,14.231) -478.657,12.951 -319.699,12.951 v3(-299.83,32.82)
MISO_S_ADC6: P16.19 R34.1 | length 300.3
  Top Layer w0.3: P16.19@-484.69,118.908 v3(-482.917,118.908)
  Top Layer w0.4: v3(-297.769,36.519) -297.769,37.176 R34.1@-297.237,37.708
  Signal Layer 1 w0.4: v3(-482.917,118.908) -481.95,118.908 ; -481.942,118.916 -479.437,116.411 -479.437,14.971 v3(-478.737,14.271)
  Bottom Layer w0.4: v3(-478.737,14.271) -321.887,14.271 -299.639,36.519 v3(-297.769,36.519)
MOSI_S_ADC: JB1.64 P10.23 P14.23 | length 339.1
  Top Layer w0.3: P10.23@-626.69,20.054 v8(-625.164,20.054) ; P14.23@-484.69,20.054 v8(-483.164,20.054)
  Top Layer w0.4: v3(-300.437,40.391) JB1.64@-300.437,43.328
  Bottom Layer w0.4: v8(-625.164,20.054) v8(-483.164,20.054) -322.096,20.054 -301.759,40.391 v3(-300.437,40.391)
NetC26_1: C26.1 R3.2 | length 4
  Top Layer w0.7: R3.2@-52.067,107.788 -52.057,107.778 C26.1@-48.117,107.778
NetC26_2: C26.2 R4.1 TRIM1.a TRIM1.b U4.5 | length 12.7
  Top Layer w0.7: TRIM1.b@-51.297,112.728 -49.337,112.728 TRIM1.a@-46.797,110.188 -46.717,110.108 C26.2@-46.717,107.778 -46.657,107.718 U4.5@-46.657,103.118
NetC27_1: C27.1 U4.3 | length 3.7
  Top Layer w0.7: U4.3@-44.117,103.118 -44.117,106.578 C27.1@-43.917,106.778
NetC42_1: C42.1 R2.2 | length 4
  Top Layer w0.7: R2.2@-52.067,70.139 -52.057,70.129 C42.1@-48.117,70.129
NetC42_2: C42.2 R1.1 TRIM2.a TRIM2.b U1.5 | length 12.7
  Top Layer w0.7: TRIM2.b@-51.297,75.079 -49.337,75.079 -46.797,72.539 -46.717,72.459 C42.2@-46.717,70.129 -46.657,70.069 U1.5@-46.657,65.469
NetC43_1: C43.1 U1.3 | length 3.7
  Top Layer w0.7: U1.3@-44.117,65.469 -44.117,68.929 C43.1@-43.917,69.129
NetD1_2: D1.2 R38.2 | length 6
  Top Layer w0.5: R38.2@-480.04,136.15 -475.031,136.15 -474.902,136.021 D1.2@-474.102,136.021
NetD2_2: D2.2 R39.2 | length 6
  Top Layer w0.5: R39.2@-480.04,139.11 -475.031,139.11 -474.902,138.981 D2.2@-474.102,138.981
NetD3_2: D3.2 R40.2 | length 6
  Top Layer w0.5: R40.2@-480.04,142.069 -475.031,142.069 -474.902,141.94 D3.2@-474.102,141.94
NetD4_2: D4.2 R41.2 | length 6
  Top Layer w0.5: R41.2@-480.04,145.029 -475.031,145.029 -474.902,144.9 D4.2@-474.102,144.9
NetD5_2: D5.2 R42.2 | length 6
  Top Layer w0.5: R42.2@-480.04,147.989 -479.44,147.989 -479.311,147.86 D5.2@-474.102,147.86
NetD6_2: D6.2 R43.2 | length 6
  Top Layer w0.5: R43.2@-480.04,150.949 -479.44,150.949 -479.311,150.82 D6.2@-474.102,150.82
NetD7_2: D7.2 R44.2 | length 6
  Top Layer w0.5: R44.2@-480.04,153.908 -479.44,153.908 -479.311,153.779 D7.2@-474.102,153.779
NetD8_2: D8.2 R45.2 | length 6
  Top Layer w0.5: R45.2@-480.04,156.868 -479.44,156.868 -479.311,156.739 D8.2@-474.102,156.739
NetJB1_46: JB1.46 R30.2 | length 4
  Top Layer w0.4: R30.2@-293.237,39.308 JB1.46@-293.237,43.328
NetJB1_50: JB1.50 R31.2 | length 8.2
  Top Layer w0.4: R31.2@-294.837,35.478 -294.367,35.948 -294.367,40.228 -294.837,40.698 JB1.50@-294.837,43.328
NetJB1_52: JB1.52 R32.2 | length 4
  Top Layer w0.4: R32.2@-295.637,39.308 JB1.52@-295.637,43.328
NetJB1_54: JB1.54 R33.2 | length 7
  Top Layer w0.4: v3(-296.437,40.918) JB1.54@-296.437,43.328
  Bottom Layer w0.4: R33.2@-296.437,36.378 v3(-296.437,40.918)
NetJB1_56: JB1.56 R34.2 | length 4
  Top Layer w0.4: R34.2@-297.237,39.308 JB1.56@-297.237,43.328
NetJB1_58: JB1.58 R35.2 | length 8.4
  Top Layer w0.4: R35.2@-298.037,35.478 -298.657,36.098 -298.657,39.44 -298.037,40.06 JB1.58@-298.037,43.328
NetJB2_89: JB2.89 P18.3 | length 3
  Top Layer w0.25: JB2.89@-310.837,89.056 -310.837,91.923 P18.3@-310.76,92
NetJB2_91: JB2.91 P18.1 | length 6.2
  Top Layer w0.25: JB2.91@-311.637,89.056 -311.637,91.107 -312.09,91.56 -312.09,93.21 P18.1@-310.76,94.54